# Altium PCB gecko3.PcbDoc (part 5 of 8)
Units mm, origin at the board's own origin, x right, y up, seen from the top; angles counter-clockwise.
Board outline 85.5 x 54.02 mm, 10 copper layers (Top Layer, MidLayer1, 1.2 & 2.5V Plane, GND Plane1, DDR layer 1, 3.3V Plane, DDR layer 2, GND Plane2, MidLayer2, Bottom Layer), stack 1.39 mm thick; 295 components, 567 nets, 2310 pads, 1568 vias.
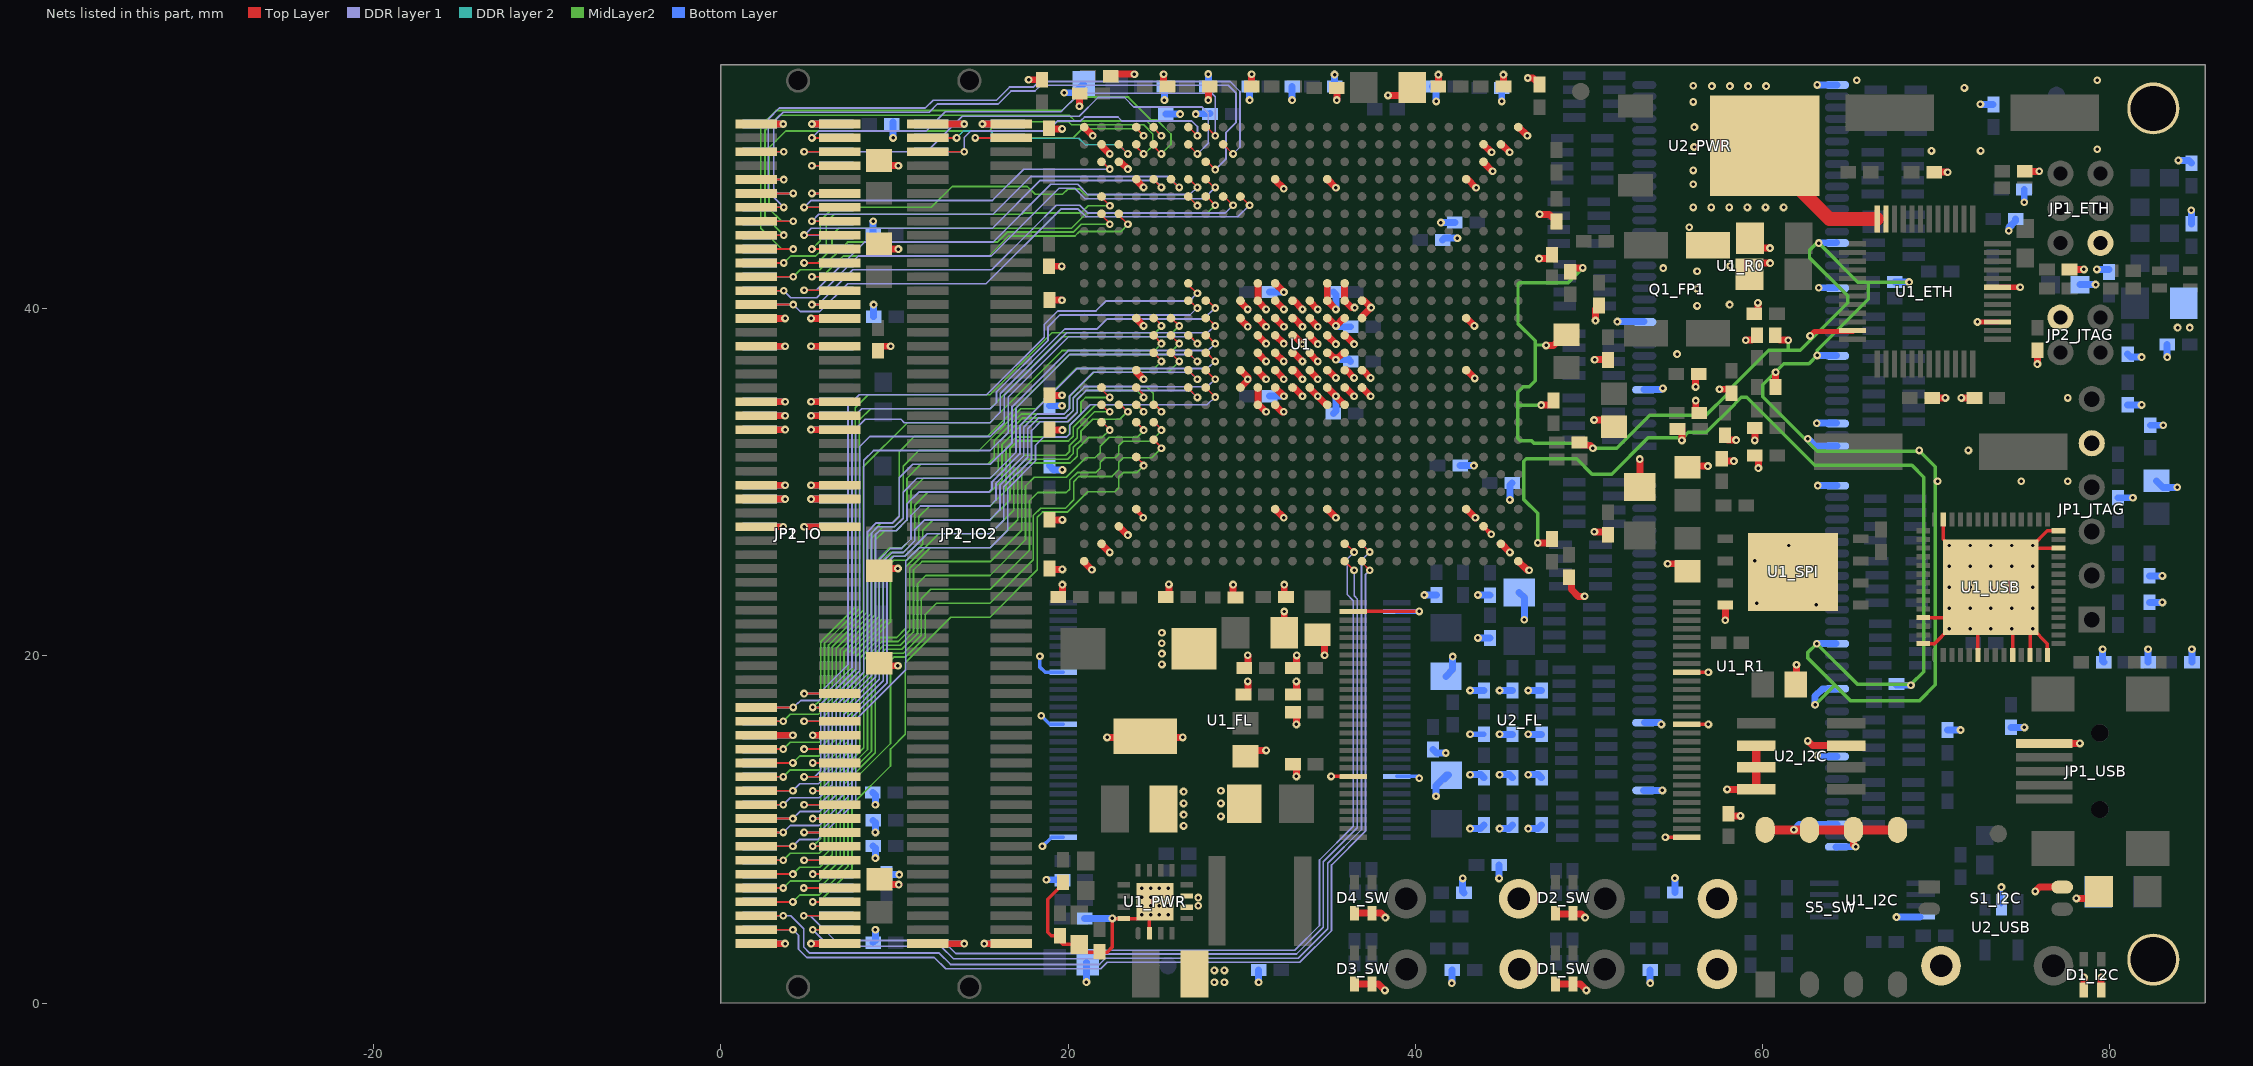
[diagram p13: the nets of this part, all layers, seen from the top]

## Via types
v1: diameter 0.45, hole 0.2, Top Layer to Bottom Layer, tented both sides, 1470 vias
v2: diameter 0.45, hole 0.2, Top Layer to Bottom Layer, tented bottom, 62 vias
v3: diameter 0.35, hole 0.15, Top Layer to MidLayer1, tented both sides, 26 vias
v4: diameter 0.45, hole 0.2, MidLayer2 to Bottom Layer, tented both sides, 10 vias

## Nets (pads, with @x,y where several pads share a name; then routed paths per layer and width w, separated by ;. In a path a pad name is that pad's centre, name@x,y a point inside that pad or via, vN(x,y) a via of type N, cw(c..) or ccw(c..) an arc to the next point about the centre after c; other vN are vias at no path point) (continued)
GND: C1_CNF.2 C1_ETH.1 C1_FL.1 C1_PWR.1 C1_USB.2 C2_CNF.2 C2_ETH.1 C2_FL.1 C2_FP1.1 C2_FP2.1 C2_IO.2 C2_PWR.1 C2_R0.1 C2_R1.1 C2_USB.1 C3_CNF.2 C3_ETH.1 C3_FL.1 C3_PWR.1 C3_USB.1 C4_CNF.2 C4_ETH.1 C4_FL.1 C4_PWR.1 C4_USB.1 C5_CNF.2 C5_ETH.1 C5_FL.1 C5_PWR.1 C5_USB.2 C6_CNF.2 C6_ETH.1 C6_FL.1 C6_USB.2 C7_CNF.1 C7_ETH.1 C7_FL.1 C7_PWR.2 C7_USB.2 C8_CNF.1 C8_ETH.1 C8_PWR.2 C8_USB.2 C9_CNF.1 C9_ETH.1 C9_PWR.2 C9_USB.2 C10_CNF.1 C10_ETH.1 C10_PWR.1 C10_USB.2 C11_CNF.1 C11_ETH.1 C11_PWR.1 C11_USB.2 C12_CNF.1 C12_ETH.1 C12_PWR.2 C12_USB.2 C13_CNF.1 C13_ETH.1 C13_PWR.2 C13_USB.2 C14_CNF.1 C14_PWR.2 C15_CNF.1 C15_PWR.1 C16_CNF.1 C16_PWR.2 C17_CNF.1 C17_PWR.1 C18_CNF.1 C18_PWR.2 C19_CNF.1 C19_PWR.2 C20_CNF.1 C20_PWR.2 C21_CNF.1 C21_PWR.2 C22_CNF.1 C22_PWR.2 C23_CNF.1 C24_CNF.1 C25_CNF.1 C26_CNF.1 C27_CNF.1 C28_CNF.1 C29_CNF.1 C30_CNF.1 C31_CNF.1 C32_CNF.1 C33_CNF.1 C34_CNF.1 C35_CNF.1 C36_CNF.1 C37_CNF.1 C38_CNF.1 C39_CNF.1 C40_CNF.1 C41_CNF.1 C42_CNF.1 C43_CNF.1 C44_CNF.1 C45_CNF.1 C46_CNF.1 C47_CNF.1 C48_CNF.1 C49_CNF.1 C50_CNF.1 C51_CNF.1 C52_CNF.1 C53_CNF.1 C54_CNF.1 C55_CNF.1 C56_CNF.1 C57_CNF.1 C58_CNF.1 C59_CNF.1 C60_CNF.1 C61_CNF.1 C62_CNF.1 C63_CNF.1 C64_CNF.1 C65_CNF.1 C66_CNF.1 C67_CNF.1 C68_CNF.1 C69_CNF.1 C70_CNF.1 C71_CNF.1 C72_CNF.1 C73_CNF.1 C74_CNF.1 C75_CNF.1 C76_CNF.1 C77_CNF.1 C78_CNF.1 C79_CNF.1 C80_CNF.1 C81_CNF.1 C82_CNF.1 C83_CNF.1 C84_CNF.1 C85_CNF.1 C86_CNF.1 C87_CNF.1 C88_CNF.1 C89_CNF.1 C90_CNF.1 C91_CNF.1 C92_CNF.1 C93_CNF.1 C94_CNF.1 C95_CNF.1 C96_CNF.1 C97_CNF.1 C98_CNF.1 D1_I2C.2 D1_I2C.4 D1_SW.2 D1_SW.4 D2_SW.2 D2_SW.4 D3_SW.2 D3_SW.4 D4_SW.2 D4_SW.4 JP1_ETH.6 JP1_IO2.1 JP1_IO2.2 JP1_IO2.119 JP1_IO2.120 JP1_IO.1 JP1_IO.2 JP1_IO.5 JP1_IO.8 JP1_IO.9 JP1_IO.12 JP1_IO.29 JP1_IO.30 JP1_IO.33 JP1_IO.34 JP1_IO.41 JP1_IO.42 JP1_IO.43 JP1_IO.44 JP1_IO.45 JP1_IO.46 JP1_IO.53 JP1_IO.54 JP1_IO.55 JP1_IO.56 JP1_IO.59 JP1_IO.60 JP1_IO.89 JP1_IO.90 JP1_IO.119 JP1_IO.120 JP1_JTAG.5 JP1_USB.GND JP2_IO2.1 JP2_IO2.2 JP2_IO2.119 JP2_IO2.120 JP2_IO.1 JP2_IO.2 JP2_IO.5 JP2_IO.8 JP2_IO.9 JP2_IO.12 JP2_IO.29 JP2_IO.30 JP2_IO.33 JP2_IO.34 JP2_IO.41 JP2_IO.42 JP2_IO.43 JP2_IO.44 JP2_IO.45 JP2_IO.46 JP2_IO.53 JP2_IO.54 JP2_IO.55 JP2_IO.56 JP2_IO.59 JP2_IO.60 JP2_IO.89 JP2_IO.90 JP2_IO.119 JP2_IO.120 JP2_JTAG.1 pad.0 Q1_FP1.2 R1_CNF.2 R1_USB.2 R2_ETH.1 R2_FL.2 R2_PWR.2 R3_ETH.1 R4_PWR.1 R7_PWR.1 S1_I2C.4 S1_SW.2 S1_USB.1 S2_SW.2 S3_SW.2 S4_SW.1 S5_SW.5 S5_SW.6 S5_SW.7 S5_SW.8 TP1_PWR.1 U1.A1 U1.A26 U1.AC4 U1.AC12 U1.AC15 U1.AC23 U1.AD3 U1.AD24 U1.AE2 U1.AE3 U1.AE25 U1.AF1 U1.AF26 U1.B2 U1.B25 U1.C3 U1.C24 U1.D4 U1.D12 U1.D15 U1.D23 U1.K11 U1.K12 U1.K15 U1.K16 U1.L10 U1.L11 U1.L12 U1.L13 U1.L14 U1.L15 U1.L16 U1.L17 U1.M4 U1.M10 U1.M11 U1.M12 U1.M13 U1.M14 U1.M15 U1.M16 U1.M17 U1.M23 U1.N11 U1.N12 U1.N13 U1.N14 U1.N15 U1.N16 U1.P11 U1.P12 U1.P13 U1.P14 U1.P15 U1.P16 U1.R4 U1.R10 U1.R11 U1.R12 U1.R13 U1.R14 U1.R15 U1.R16 U1.R17 U1.R23 U1.T10 U1.T11 U1.T12 U1.T13 U1.T14 U1.T15 U1.T16 U1.T17 U1.U11 U1.U12 U1.U15 U1.U16 U1_ETH.15 U1_ETH.19 U1_ETH.35 U1_ETH.36 U1_ETH.47 U1_FL.2 U1_FL.21 U1_FL.29 U1_FL.42 U1_FL.48 U1_I2C.4 U1_PWR.2 U1_PWR.6 U1_PWR.7 U1_PWR.16 U1_PWR.17 U1_R0.6 U1_R0.12 U1_R0.34 U1_R0.48 U1_R0.52 U1_R0.58 U1_R0.64 U1_R0.66 U1_R1.6 U1_R1.12 U1_R1.34 U1_R1.48 U1_R1.52 U1_R1.58 U1_R1.64 U1_R1.66 U1_SPI.4 U1_SPI.9 U1_USB.6 U1_USB.10 U1_USB.12 U1_USB.14 U1_USB.26 U1_USB.28 U1_USB.41 U1_USB.53 U1_USB.56 U1_USB.57 U2_FL.2 U2_FL.21 U2_FL.29 U2_FL.42 U2_FL.48 U2_I2C.2 U2_I2C.3 U2_I2C.4 U2_I2C.7 U2_PWR.4 U2_USB.2 | length 554.4
  Top Layer w0.1: JP2_IO.9@2.05,47.425 v1(3.625,47.425) ; JP2_IO.5@2.05,49.025 v1(3.625,49.025) ; v1(5.25,46.625) JP2_IO.12@6.85,46.625 ; v1(5.25,48.225) JP2_IO.8@6.85,48.225
  Top Layer w0.2: C2_PWR.1@19.7,6.95 19.7,6.85 18.825,5.975 18.825,4.075 19.025,3.875 C3_PWR.1@19.525,3.875 19.525,3.55 19.7,3.375 R4_PWR.1@20.65,3.375 21.1,2.925 22.25,2.925 22.55,3.225 v1(22.55,4.875) 22.561,4.864 24.018,4.864 v2(24.246,5.092) ; U1_PWR.2@24.681,4.019 24.681,5.02 v2(24.753,5.092) ; v1(35.15,13.05) 36.411,13.05 U2_FL.21@36.397,13.036 ; U2_FL.2@36.425,22.525 36.454,22.554 v1(40.221,22.554) ; v1(54.4,9.55) U2_FL.29@55.625,9.55 ; U2_FL.48@55.583,19.05 U2_FL.48@55.597,19.036 ; U2_FL.42@55.625,16.05 v1(56.875,16.05) ; U2_FL.48@55.625,19.05 v1(56.875,19.05) ; U1_USB.56@69.25,20.7 69.9,20.7 v2(70.75,21.55) ; U1_USB.53@69.25,22.2 70.6,22.2 70.75,22.35 v2(70.75,22.75) ; U1_USB.41@70.4,27.85 70.4,26.7 v2(70.75,26.35) ; v2(71.95,21.55) 72.325,21.55 72.4,21.475 U1_USB.6@72.4,20.05 ; v2(74.35,21.55) 74.4,21.5 U1_USB.10@74.4,20.05 ; U1_USB.12@75.4,20.05 75.4,21.4 v2(75.55,21.55) 76.4,20.7 U1_USB.14@76.4,20.05 ; U1_USB.26@77.05,26.2 75.7,26.2 v2(75.55,26.35) 76.4,27.2 U1_USB.28@77.05,27.2
  Top Layer w0.254: U1.D23@23.927,28.449 23.927,28.423 v1(24.325,27.95) ; U1.L13@33.927,35.449 U1.L13@33.931,35.449 ; U1.K12@34.927,34.449 U1.K12@34.927,34.453 ; U1.U12@34.927,41.449 U1.U12@34.953,41.449 ; U1.N11@35.874,37.449 U1.N11@35.927,37.449 ; U1.K11@35.924,34.449 U1.K11@35.927,34.449 ; U1.R11@35.927,39.438 U1.R11@35.927,39.449 ; U1.R10@36.927,39.449 U1.R10@36.933,39.449 ; U1.C3@43.927,27.449 v1(44.375,27)
  Top Layer w0.3: U1.AD3@43.927,48.423 U1.AD3@43.927,48.449 ; U1.AF1@45.927,50.449 U1.AF1@45.951,50.449 ; v1(62.736,38.421) 62.986,38.671 U1_ETH.47@65.186,38.671 ; v1(72.375,39.225) U1_ETH.15@73.525,39.225 ; U1_ETH.19@73.525,41.225 v1(74.825,41.225)
  Top Layer w0.381: JP2_IO.119@2.05,3.425 v1(3.7,3.425) ; JP2_IO.89@2.05,15.425 v1(4.15,15.425) ; JP2_IO.59@2.05,27.425 v1(3.6,27.425) ; JP2_IO.55@2.05,29.025 v1(3.7,29.025) ; JP2_IO.53@2.05,29.825 v1(3.7,29.825) ; JP2_IO.45@2.05,33.025 v1(3.7,33.025) ; JP2_IO.43@2.05,33.825 v1(3.7,33.825) ; JP2_IO.41@2.05,34.625 v1(3.7,34.625) ; JP2_IO.33@2.05,37.825 v1(3.7,37.825) ; JP2_IO.29@2.05,39.425 v1(3.7,39.425) ; JP2_IO.1@2.05,50.625 v1(3.6,50.625) ; v1(4.8,27.425) JP2_IO.60@6.85,27.425 ; v1(5.2,3.425) JP2_IO.120@6.85,3.425 ; v1(5.2,29.025) JP2_IO.56@6.85,29.025 ; v1(5.2,29.825) JP2_IO.54@6.85,29.825 ; v1(5.2,33.025) JP2_IO.46@6.85,33.025 ; v1(5.2,33.825) JP2_IO.44@6.85,33.825 ; v1(5.2,34.625) JP2_IO.42@6.85,34.625 ; v1(5.2,37.825) JP2_IO.34@6.85,37.825 ; v1(5.2,39.425) JP2_IO.30@6.85,39.425 ; v1(5.25,50.625) JP2_IO.2@6.85,50.625 ; v1(5.3,15.425) JP2_IO.90@6.85,15.425 ; JP1_IO2.119@11.918,3.426 v1(14.025,3.425) ; JP1_IO2.1@11.918,50.626 v1(14.025,50.625) ; v1(15.068,50.626) JP1_IO2.2@16.718,50.626 ; v1(15.175,3.425) JP1_IO2.120@16.718,3.426
  Top Layer w0.4: C74_CNF.1@9.05,37.6 9.275,37.825 v1(9.775,37.825) ; C2_CNF.2@9.1,43.7 9.375,43.425 v1(10.225,43.425) ; C70_CNF.1@9.1,48.525 9.4,48.225 v1(10.225,48.225) ; C3_CNF.2@9.125,19.575 9.275,19.425 v1(10.2,19.425) ; C1_CNF.2@9.125,24.9 9.25,25.025 v1(10.2,25.025) ; C5_CNF.2@9.15,7.125 9.45,6.825 v1(10.25,6.825) ; v1(17.725,53.175) C76_CNF.1@18.5,53.175 ; C76_CNF.1@18.497,53.17 C76_CNF.1@18.633,53.034 ; C52_CNF.1@18.897,42.424 18.904,42.431 v1@19.645,42.431 ; C89_CNF.1@18.9,50.375 18.929,50.346 v1(19.659,50.346) ; C62_CNF.1@18.923,40.491 19.634,40.491 v1(19.65,40.475) v1@19.641,40.491 ; C87_CNF.1@18.925,25.025 18.975,24.975 v1(19.675,24.975) ; C88_CNF.1@18.925,27.65 C88_CNF.1@19.062,27.787 ; C88_CNF.1@18.925,27.825 v1(19.675,27.825) ; C77_CNF.1@18.929,33.029 18.958,33 v1(19.675,33) ; C61_CNF.1@18.931,35.01 18.941,35 v1(19.65,35) ; C86_CNF.1@19.425,23.35 19.675,23.6 v1(19.675,24.1) ; v1(20.657,51.649) 20.657,52.362 C90_CNF.1@20.67,52.376 ; U1.A26@20.927,25.449 20.927,25.398 v1(21.375,24.95) ; U1.AF26@20.927,50.449 v1(21.425,49.95) ; U1.B25@21.927,26.449 21.927,26.423 v1(22.4,25.95) ; U1.AE25@21.927,49.449 21.927,49.373 v1(22.4,48.9) ; v1(22.25,15.3) v1(26.6,15.3) ; C29_CNF.1@22.45,53.375 22.568,53.493 v1(23.824,53.493) ; U1.C24@22.927,27.449 v1@23.425,26.95 ; U1.AD24@22.927,48.449 23.026,48.449 v1(23.45,48.025) ; U1.M23@23.927,36.449 23.927,36.348 v1(24.35,35.925) ; U1.R23@23.927,39.449 23.927,39.423 v1(24.35,39) ; U1.AC23@23.927,47.449 23.927,47.398 v1(24.35,46.975) ; v1(25.499,53.495) 25.499,52.97 C30_CNF.1@25.714,52.755 ; C75_CNF.1@25.635,23.367 25.811,23.543 v1(25.811,24.106) ; v1(28.075,52) 28.075,52.7 C41_CNF.1@28.15,52.775 ; v1(29.5,24.1) 29.5,23.501 C51_CNF.1@29.641,23.359 ; U1.L17@29.927,35.449 30.35,35.872 30.35,36.026 U1.M17@29.927,36.449 ; U1.R17@29.927,39.449 29.927,39.373 v1(30.35,38.95) ; U1.T17@29.927,40.449 29.927,40.373 v1(30.35,39.95) ; C35_CNF.1@30.1,17.775 30.35,18.025 v1(30.35,18.525) ; C3_FL.1@30.2,19.3 30.35,19.45 v1(30.35,20.025) ; C4_CNF.2@30.225,14.225 30.55,14.55 v1(31.4,14.55) ; C60_CNF.1@30.569,52.785 v1(30.569,53.486) ; U1.L16@30.927,35.449 U1.K16@30.927,34.449 31.001,34.449 v1(31.4,34.05) ; U1.M16@30.927,36.449 30.927,36.398 v1(31.4,35.925) ; U1.N16@30.927,37.449 30.927,37.423 v1(31.4,36.95) ; U1.P16@30.927,38.448 v1(31.4,37.975) ; U1.R16@30.927,39.449 30.927,39.423 v1(31.4,38.95) ; U1.U16@30.927,41.449 30.927,40.423 v1(31.4,39.95) ; U1.D15@31.927,28.448 v1(32.425,27.95) ; U1.K15@31.927,34.449 32.326,34.05 v1(32.425,34.05) ; U1.L15@31.927,35.449 32.431,34.945 v1(32.434,34.945) ; U1.M15@31.927,36.449 31.976,36.449 v1(32.425,35.925) ; U1.N15@31.927,37.449 v1(32.425,36.95) ; U1.P15@31.927,38.449 31.951,38.449 v1(32.425,37.975) ; U1.R15@31.927,39.449 v1(32.43,38.945) ; U1.T15@31.927,40.449 v1(32.43,39.945) ; U1.U15@31.927,41.449 31.931,41.449 v1(32.434,40.945) ; U1.AC15@31.927,47.449 31.927,47.398 v1(32.425,46.9) ; C46_CNF.1@32.45,21.325 v1(32.45,22.55) ; v1(32.45,24.1) 32.45,23.475 C66_CNF.1@32.55,23.375 ; C8_CNF.1@32.925,13.8 33.15,13.575 v1(33.15,13.05) ; U1.L14@32.927,35.449 33.001,35.449 v1(33.5,34.95) ; U1.M14@32.927,36.449 33.051,36.449 v1(33.5,35.925) ; U1.N14@32.927,37.449 33.001,37.449 v1(33.5,36.95) ; U1.P14@32.927,38.449 33.001,38.449 v1(33.5,37.95) ; U1.R14@32.927,39.449 33.001,39.449 v1(33.5,38.95) ; U1.T14@32.927,40.449 33.001,40.449 v1(33.5,39.95) ; C5_FL.1@32.931,19.294 32.956,19.294 33.165,19.503 v1(33.165,20.022) ; C40_CNF.1@32.95,16.75 33.15,16.55 v1(33.15,16.05) ; C2_FL.1@32.95,17.775 33.15,17.975 v1(33.15,18.525) ; U1.L13@33.927,35.449 33.927,35.398 34.876,34.449 U1.K12@34.927,34.449 ; U1.M13@33.927,36.449 v1(34.375,35.925) ; U1.N13@33.927,37.449 33.927,37.398 v1(34.375,36.95) ; U1.P13@33.927,38.449 33.927,38.398 v1(34.375,37.95) ; U1.R13@33.927,39.449 33.927,39.398 v1(34.375,38.95) ; U1.T13@33.927,40.449 33.927,40.398 v1(34.375,39.95) ; C49_CNF.1@34.375,21.2 34.775,20.8 v1(34.775,20.025) ; U1.D12@34.927,28.448 v1(35.425,27.95) ; U1.L12@34.927,35.448 35.924,34.451 U1.K11@35.924,34.449 ; U1.M12@34.927,36.449 34.976,36.449 v1(35.425,36) ; U1.N12@34.927,37.449 35.026,37.449 v1(35.425,37.05) 35.824,37.449 U1.N11@35.927,37.449 ; U1.P12@34.927,38.448 v1(35.425,37.95) ; U1.R12@34.927,39.449 34.976,39.449 v1(35.425,39) 35.863,39.438 U1.R11@35.927,39.438 ; U1.U12@34.927,41.449 U1.T12@34.927,40.449 v1(35.425,39.95) ; U1.AC12@34.927,47.449 v1(35.425,46.95) ; v1(35.475,52) C63_CNF.1@35.475,52.725 ; U1.L11@35.927,35.449 35.976,35.449 v1(36.475,34.95) ; U1.M11@35.927,36.449 36.026,36.449 v1(36.475,36) ; U1.P11@35.927,38.449 35.976,38.449 v1(36.475,37.95) ; U1.U11@35.927,41.449 U1.T11@35.927,40.449 36.326,40.05 v1(36.5,40.05) ; D3_SW.2@36.5,1.1 37.875,1.1 v1(38.25,0.725) ; D4_SW.2@36.5,5.175 38.025,5.175 v1(38.275,4.925) ; U1.L10@36.927,35.448 v1(37.425,34.95) ; U1.M10@36.927,36.449 36.976,36.449 v1(37.425,36) ; U1.R10@36.927,39.449 36.927,39.527 v1(37.45,40.05) 37.051,40.449 U1.T10@36.927,40.449 ; v1(38.425,52.275) 39.375,52.275 C47_CNF.1@39.825,52.725 ; R1_CNF.2@41.325,52.775 v1(41.325,53.475) ; U1.D4@42.927,28.449 42.952,28.449 v1(43.455,27.945) ; U1.M4@42.927,36.449 42.951,36.449 v1(43.425,35.975) ; U1.R4@42.927,39.449 42.951,39.449 v1(43.4,39) ; U1.AC4@42.927,47.449 43.001,47.449 v1(43.5,46.95) ; U1.AD3@43.927,48.423 v1(44.45,47.9) ; U1.AE3@43.927,49.449 v1(44.394,49.002) ; U1.B2@44.875,26.45 44.95,26.45 v1(45.45,25.95) ; U1.AE2@44.927,49.449 44.976,49.449 v1(45.425,49) ; C94_CNF.1@45.075,52.775 v1(45.075,53.475) ; U1.A1@45.927,25.423 45.929,25.423 45.951,25.425 46.451,24.925 v1(46.55,24.925) ; U1.AF1@45.951,50.449 v1(46.45,49.95) ; v1(46.475,53.275) 46.775,53.275 C93_CNF.1@47.15,52.9 C93_CNF.1@47.15,52.675 ; v1(47.05,26.5) 47.65,26.5 C85_CNF.1@47.875,26.725 ; v1(47.125,42.875) 47.645,42.875 C81_CNF.1@47.856,43.087 ; v1(47.156,45.425) 47.714,45.425 C2_FP2.1@48.128,45.011 ; v1(47.254,34.438) 47.739,34.438 C82_CNF.1@47.983,34.682 ; v1(47.525,37.875) 47.944,37.875 C48_CNF.1@48.565,38.497 ; D1_SW.2@48.075,1.1 49.5,1.1 49.85,0.75 v1(49.85,0.725) ; D2_SW.2@48.075,5.125 49.575,5.125 v1(49.775,4.925) ; C83_CNF.1@48.85,24.475 48.9,24.475 49,24.375 49,23.805 49.38,23.425 v1(49.75,23.425) ; C83_CNF.1@48.875,24.6 C83_CNF.1@48.9,24.6 ; C54_CNF.1@49.2,42.335 v1(49.642,42.335) ; C2_FP1.1@49.425,32.325 49.625,32.125 50.05,32.125 v1(50.225,31.95) ; C2_FP1.1@49.45,32.275 C2_FP1.1@49.708,32.275 ; v1(50.291,33.578) 51.062,33.578 C69_CNF.1@51.439,33.201 ; v1(50.31,27.138) C73_CNF.1@50.927,27.138 ; v1(50.325,37.05) 51.031,37.05 51.074,37.007 C72_CNF.1@51.101,37.034 ; v1(50.375,39.3) 50.375,39.975 C21_PWR.2@50.575,40.175 ; C67_CNF.1@52.925,29.725 v1(52.925,31.325) ; v1(54.526,25.298) 55.244,25.298 C68_CNF.1@55.671,24.87 ; C14_PWR.2@55.077,33.045 C14_PWR.2@55.25,33.045 ; v1(55.35,32.4) C14_PWR.2@55.35,33.045 ; C6_CNF.2@55.675,30.85 55.675,30.925 v1(56.85,30.925) ; v1(56.14,35.488) 56.14,36.013 C19_PWR.2@56.355,36.228 ; v1(56.15,34.7) 56.15,34.2 C37_CNF.1@56.375,33.975 ; v1(57.516,35.35) 58.016,35.35 C20_PWR.2@58.231,35.135 ; C12_PWR.2@57.608,31.428 57.823,31.213 v1(58.348,31.213) ; C36_CNF.1@57.7,32.7 57.975,32.425 v1(58.475,32.425) ; v1(57.85,22.05) U1_SPI.4@57.85,22.92 ; v1(57.95,12.3) 59.628,12.3 U2_I2C.4@59.63,12.302 ; C12_CNF.1@58,10.9 58.125,10.775 v1(58.725,10.775) ; v1(59.025,38.175) 59.392,38.175 R7_PWR.1@59.679,38.462 ; C17_PWR.1@59.252,41.977 59.887,42.612 v1(60.432,42.612) ; C10_PWR.1@59.275,44.05 59.85,43.475 v1(60.425,43.475) ; C14_CNF.1@59.512,39.576 59.734,39.797 v1(59.725,40.325) ; C18_CNF.1@59.545,31.553 59.76,31.338 v1(59.76,30.813) ; v1(59.55,32.4) C18_PWR.2@59.55,33.125 ; C15_PWR.1@60.729,38.462 C15_PWR.1@60.965,38.227 ; C11_PWR.1@60.746,35.475 60.756,35.485 v1(60.75,36.325) ; C15_PWR.1@60.976,38.173 v1(61.478,38.173) ; C71_CNF.1@61.901,18.348 61.951,18.398 v1(61.951,19.479) ; v1(62.6,15.1) 62.875,14.825 64.803,14.825 U2_I2C.7@64.812,14.817 ; S5_SW.6@65.236,9.969 65.236,9.107 65.243,9.107 v1(65.35,9) ; C3_USB.1@69.775,34.85 v1(70.525,34.85) ; C10_ETH.1@69.875,47.85 v1(70.65,47.85) ; v1(71.45,34.85) C2_USB.1@72.2,34.85 ; C9_ETH.1@75.1,47.9 75.923,47.9 v1(75.932,47.908) ; v1(75.7,6.425) 75.95,6.675 S1_I2C.4@77.25,6.675 ; v1(75.825,36.8) C8_ETH.1@75.825,37.6 ; JP1_USB.GND@76.225,14.95 78.2,14.95 v1(78.275,14.95) ; C4_ETH.1@77.675,42.25 v1(78.5,42.25) ; v1(78.075,6.025) 78.975,6.025 C1_USB.2@79.375,6.425 ; D1_I2C.2@78.5,0.75 v1(78.5,1.49) ; D1_I2C.4@79.5,0.75 v1(79.5,1.49)
  Top Layer w0.5: U2_I2C.4@59.63,12.302 U2_I2C.2@59.63,14.817 ; S5_SW.8@60.167,9.965 S5_SW.5@67.787,9.965
  Top Layer w0.8: U2_PWR.4@60.125,49.375 60.125,48.875 63.85,45.15 U1_ETH.36@66.6,45.15
  MidLayer2 w0.2: 45.911,34.438 v1(47.254,34.438) ; 46.9,37.925 v1(47.525,37.875) ; v1(47.05,26.5) 47.05,28.2 46.252,28.998 46.252,31.202 46.391,31.341 49.284,31.341 50.175,30.45 51.3,30.45 53.4,32.55 v1@55.4,32.55 ; v1(49.642,42.335) 48.804,41.496 46.011,41.496 45.911,41.396 45.911,39.121 46.9,38.132 46.9,35.835 46.561,35.496 46.221,35.496 45.9,35.175 45.9,32.53 46.052,32.378 46.691,32.378 46.816,32.253 49.922,32.253 v1(50.225,31.95) 51.6,31.95 53.5,33.85 56.74,33.85 58.011,35.121 58.011,35.261 60.346,37.596 62.161,37.596 64.9,40.335 64.9,40.725 62.7,42.925 62.7,43.35 63.121,43.771 v1(63.236,43.771) 65.486,41.521 v1(68.436,41.521) ; v1@55.25,32.4 55.425,32.575 55.45,32.6 55.721,32.871 56.761,32.871 58.297,34.407 58.515,34.625 58.774,34.884 59.091,34.884 63,30.975 68.6,30.975 69.286,30.289 69.286,19.086 68.571,18.371 65.441,18.371 v1(63.117,20.696) ; v1(61.478,38.173) 61.486,38.165 61.486,37.596 ; v1(63.025,17.175) 63.025,17.181 64.163,18.319 ; v1(63.117,20.696) 62.586,20.165 62.586,19.896 64.163,18.319 ; 66.086,41.521 66.086,40.531 63.142,37.587 v1(63.142,37.296) 62.671,36.825 61.225,36.825 60,35.6 60,34.925 63.138,31.787 69.038,31.787 69.95,30.875 69.95,18.325 69.021,17.396 65.086,17.396 64.163,18.319
  Bottom Layer w0.1: JP1_IO.9@2.25,47.425 v1(3.625,47.425) ; JP1_IO.5@2.25,49.025 v1(3.625,49.025) ; v1(5.25,46.625) JP1_IO.12@6.65,46.625 ; v1(5.25,48.225) JP1_IO.8@6.65,48.225
  Bottom Layer w0.2: v1(18.375,19.975) 18.375,19.35 18.675,19.05 U1_FL.48@19.725,19.05 ; v1(18.45,16.55) 18.95,16.05 U1_FL.42@19.725,16.05 ; v1(18.525,9.025) 19.05,9.55 U1_FL.29@19.725,9.55 ; U1_FL.21@38.925,13.05 v1@40.225,13.05 ; U2_USB.2@73.754,5.659 v1(73.754,6.675)
  Bottom Layer w0.3: U1_FL.2@38.925,22.55 v1(40.221,22.554) ; v1(43.15,15.475) C32_CNF.1@43.95,15.475
  Bottom Layer w0.381: JP1_IO.119@2.25,3.425 v1(3.7,3.425) ; JP1_IO.89@2.25,15.425 v1(4.15,15.425) ; JP1_IO.59@2.25,27.425 v1(3.6,27.425) ; JP1_IO.55@2.25,29.025 v1(3.7,29.025) ; JP1_IO.53@2.25,29.825 v1(3.7,29.825) ; JP1_IO.45@2.25,33.025 v1(3.7,33.025) ; JP1_IO.43@2.25,33.825 v1(3.7,33.825) ; JP1_IO.41@2.25,34.625 v1(3.7,34.625) ; JP1_IO.33@2.25,37.825 v1(3.7,37.825) ; JP1_IO.29@2.25,39.425 v1(3.7,39.425) ; JP1_IO.1@2.25,50.625 v1(3.6,50.625) ; v1(4.8,27.425) JP1_IO.60@6.65,27.425 ; v1(5.2,3.425) JP1_IO.120@6.65,3.425 ; v1(5.2,29.025) JP1_IO.56@6.65,29.025 ; v1(5.2,29.825) JP1_IO.54@6.65,29.825 ; v1(5.2,33.025) JP1_IO.46@6.65,33.025 ; v1(5.2,33.825) JP1_IO.44@6.65,33.825 ; v1(5.2,34.625) JP1_IO.42@6.65,34.625 ; v1(5.2,37.825) JP1_IO.34@6.65,37.825 ; v1(5.2,39.425) JP1_IO.30@6.65,39.425 ; v1(5.25,50.625) JP1_IO.2@6.65,50.625 ; v1(5.3,15.425) JP1_IO.90@6.65,15.425 ; JP2_IO2.119@12.118,3.426 v1(14.025,3.425) ; JP2_IO2.1@12.118,50.626 v1(14.025,50.625) ; v1(15.068,50.626) JP2_IO2.2@16.518,50.626 ; v1(15.175,3.425) JP2_IO2.120@16.518,3.426
  Bottom Layer w0.4: C13_CNF.1@8.75,12.125 8.9,11.975 v1(8.9,11.425) ; C16_CNF.1@8.775,3.475 8.9,3.6 v1(8.9,4.225) ; C17_CNF.1@8.775,9.05 8.9,8.925 v1(8.9,8.35) ; C9_CNF.1@8.775,10.525 8.9,10.4 v1(8.9,9.825) ; C38_CNF.1@8.775,44.275 v1(8.775,45.025) ; C39_CNF.1@8.8,39.525 v1(8.8,40.225) ; C7_CNF.1@9.55,7.45 9.6,7.4 v1(10.275,7.4) ; v1(9.925,49.825) C27_CNF.1@9.925,50.75 ; v1(18.75,7.1) 19.65,7.1 C22_PWR.2@19.675,7.075 ; C26_CNF.1@18.925,30.95 19.175,30.7 v1(19.675,30.7) ; C22_CNF.1@18.925,34.4 v1(19.65,34.4) ; v1(19.775,52.425) 20.4,52.425 C50_CNF.1@20.9,52.925 ; C1_PWR.1@20.95,4.875 v1(22.55,4.875) ; v1(21.058,1.21) C9_PWR.2@21.058,2.35 ; v1@25.55,51.975 v1(25.55,52) C28_CNF.1@25.55,52.775 ; C42_CNF.1@25.625,51.2 v1(26.45,51.2) ; v1(27.35,51.2) C25_CNF.1@28.175,51.225 ; C91_CNF.1@27.996,52.776 28.075,52.855 v1(28.075,53.5) ; C44_CNF.1@30.425,52.775 30.45,52.75 v1(30.45,52) ; v1(30.975,1.2) C15_CNF.1@30.975,1.9 ; C58_CNF.1@31.6,34.95 32.43,34.95 v1(32.434,34.945) ; C59_CNF.1@31.6,40.95 32.43,40.95 v1(32.434,40.945) ; C80_CNF.1@32.89,52.795 32.89,52.01 v1(32.9,52) ; C56_CNF.1@35.275,33.95 35.423,34.098 v1(35.425,34.95) ; C57_CNF.1@35.275,40.95 35.434,40.791 v1(35.425,39.95) ; C92_CNF.1@35.35,52.725 35.35,53.5 v1(35.35,53.475) ; v1(35.425,37.05) 36.175,37.05 C98_CNF.1@36.275,36.95 ; v1@35.439,38.95 C97_CNF.1@36.275,38.95 ; v1(40.525,23.5) C55_CNF.1@41.225,23.5 ; C79_CNF.1@41,52.775 41.2,52.575 v1(41.2,51.925) ; R2_FL.2@41.025,14.6 41.225,14.4 v1(41.75,14.4) ; v1(41.189,11.912) 41.189,12.514 C8_PWR.2@41.795,13.121 ; v1(41.475,44.95) C96_CNF.1@42.275,44.95 ; C65_CNF.1@41.575,43.95 41.675,44.05 v1(42.425,44.05) ; C8_PWR.2@41.679,12.915 C8_PWR.2@41.901,13.137 ; C45_CNF.1@41.764,18.815 42.15,19.201 v1(42.15,19.95) ; v1(42.1,1.15) 42.115,1.91 C10_CNF.1@42.125,1.9 ; C64_CNF.1@42.575,30.95 v1@43.369,30.95 ; v1(42.725,7.175) 42.725,6.425 C13_PWR.2@42.8,6.35 ; v1(43.15,10.05) 43.75,10.05 C11_CNF.1@43.95,10.25 ; v1(43.15,13.15) 43.775,13.15 C78_CNF.1@43.95,12.975 ; v1(43.15,18) C34_CNF.1@43.95,18 ; v1(43.6,21.025) C84_CNF.1@44.3,21.025 ; v1(43.6,23.5) 44.28,23.5 C24_CNF.1@44.294,23.486 ; v1(44.825,7.175) C20_CNF.1@44.825,7.95 ; v1(44.85,10.05) 45.4,10.05 C6_FL.1@45.6,10.25 ; v1(44.85,13.15) 45.425,13.15 C43_CNF.1@45.6,12.975 ; v1(44.85,15.475) C33_CNF.1@45.6,15.475 ; v1(44.85,18) C23_CNF.1@45.6,18 ; v1(44.975,51.925) 44.975,52 C53_CNF.1@44.975,52.775 ; v1(45.45,28.975) 45.45,29.825 C95_CNF.1@45.575,29.95 ; C4_FL.1@45.981,23.644 46.275,23.35 v1(46.275,22.075) ; v1(46.5,10.05) 47.075,10.05 C7_FL.1@47.275,10.25 ; v1(46.5,13.15) 47.1,13.15 C1_FL.1@47.275,12.975 ; v1(46.5,15.475) C21_CNF.1@47.275,15.475 ; v1(46.5,18) C31_CNF.1@47.275,18 ; v1(51.636,39.246) U1_R0.12@53.161,39.246 ; U1_R1.6@53.136,12.246 v1(54.23,12.246) ; U1_R0.6@53.161,35.346 54.136,35.346 v1(54.261,35.396) ; U1_R1.12@53.186,16.146 54.079,16.146 v1(54.175,16.05) ; v1(53.525,1.15) C19_CNF.1@53.525,1.9 ; C16_PWR.2@54.95,6.375 v1(54.95,7.2) ; v1(61.8,9.975) 62.121,10.296 U1_R1.64@64.286,10.296 ; v1(62.6,32.5) 63.029,32.071 U1_R0.66@64.286,32.071 ; v1(63.025,17.175) 63.025,17.675 63.446,18.096 U1_R1.52@64.236,18.096 ; v1(63.117,20.696) U1_R1.48@64.236,20.696 ; v1(63.117,33.396) U1_R0.64@64.261,33.396 ; v1(63.142,37.296) U1_R0.58@64.261,37.296 ; v1(63.15,14.275) 63.229,14.196 U1_R1.58@64.286,14.196 ; v2(63.15,52.875) U1_R0.34@64.286,52.871 ; v1(63.175,29.8) 64.282,29.8 U1_R1.34@64.286,29.796 ; v1(63.236,41.196) U1_R0.52@64.261,41.196 ; v1(63.236,43.771) U1_R0.48@64.261,43.796 ; U1_R1.66@64.236,8.996 U1_R1.66@64.286,8.996 v1(65.35,9) ; C2_R0.1@67.609,41.521 v1(68.436,41.521) ; v1(67.71,4.95) U1_I2C.4@69.075,4.95 ; C2_R1.1@67.711,18.301 v1(68.538,18.301) ; C4_USB.1@70.65,15.725 v1(71.399,15.725) ; v1(72.543,51.758) C3_ETH.1@73.275,51.758 ; v1(74.175,44.475) 74.175,44.65 74.575,45.05 C5_ETH.1@74.575,45.15 ; C11_USB.2@74.3,15.875 v1(75.075,15.875) ; v1(75.067,46.118) R3_ETH.1@75.067,46.85 ; v1(78.075,6.025) 78.953,6.025 R1_USB.2@79.333,6.405 ; R2_ETH.1@78.275,41.375 v1(79.175,41.375) ; v1(79.25,42.25) C6_ETH.1@79.95,42.25 ; v1(79.575,20.375) 79.575,19.7 C8_USB.2@79.65,19.625 ; C10_USB.2@80.475,29.1 v1(81.325,29.1) ; C1_ETH.1@81.025,34.45 v1(81.825,34.45) ; C7_ETH.1@81.025,37.375 81.2,37.2 v1(81.825,37.2) ; C13_USB.2@82.2,19.625 v1(82.2,20.375) ; C7_USB.2@82.275,23.075 v1(83.025,23.075) ; C6_USB.2@82.275,24.6 v1(83.025,24.6) ; C9_USB.2@82.325,33.275 v1(83.075,33.275) ; C5_USB.2@82.675,30.075 83.05,29.7 v1(83.875,29.7) ; v1(83.3,37.2) C2_ETH.1@83.3,37.925 ; v1(83.95,48.525) 84.553,48.525 C12_ETH.1@84.706,48.372 ; C11_ETH.1@84.699,44.873 v1@84.699,45.641 ; C12_USB.2@84.725,19.625 v1(84.725,20.375)
  other v1: 28.425,1.2 29,1.2 28.425,1.875 29,1.875 27.5,5.6 27.5,6.075 26.65,10.2 28.8,10.75 26.65,10.85 26.65,11.5 28.8,11.5 26.65,12.175 28.8,12.225 40.225,12.95 25.4,19.5 25.4,20.125 25.399,20.724 25.4,21.325 23.45,26.95 70.075,30.05 74.9,30.05 77.575,30.05 43.375,30.95 69.025,31.825 71.85,31.825 77.575,34.85 34.375,34.95 30.35,35.925 55.075,37.375 83.9,38.9 84.6,38.9 56.225,40.15 58.1,40.225 56.225,41.125 56.225,42.15 54.275,42.325 19.633,42.424 58.125,42.45 55.775,44.675 84.683,45.657 69.725,49.075 72.55,49.075 79.275,49.175 71.625,52.7 65.425,53.15 79.275,53.15
  other v2: 25.247,5.092 25.767,5.092 24.246,5.599 24.753,5.599 25.247,5.599 25.767,5.599 24.246,6.093 24.753,6.093 25.247,6.093 25.767,6.093 24.246,6.613 24.753,6.613 25.247,6.613 25.767,6.613 73.15,21.55 71.95,22.75 73.15,22.75 74.35,22.75 75.55,22.75 63.1,22.925 59.675,23.025 70.75,23.95 71.95,23.95 73.15,23.95 74.35,23.95 75.55,23.95 70.75,25.15 71.95,25.15 73.15,25.15 74.35,25.15 75.55,25.15 59.55,25.475 61.5,26.35 71.95,26.35 73.15,26.35 74.35,26.35 56,45.825 57.041,45.825 58.083,45.825 59.124,45.825 60.166,45.825 61.207,45.825 56,47.15 56,47.95 56.05,49.3 56.075,50.45 56,51.9 56,52.825 57.077,52.812 58.119,52.812 59.16,52.812 60.202,52.812
GPIO1_0: JP1_IO.4 JP2_IO.4 U1.AF19 | length 30.4
  Top Layer w0.1: v1(5.25,49.825) JP2_IO.4@6.85,49.825 ; U1.AF19@27.927,50.449 27.976,50.449 v1(28.475,49.95)
  DDR layer 1 w0.1: v1(5.25,49.825) 5.65,50.225 11.825,50.225 12.925,51.325 19.593,51.325 20.671,52.403 28.272,52.403 28.475,52.2 v1(28.475,49.95)
  Bottom Layer w0.1: v1(5.25,49.825) JP1_IO.4@6.65,49.825
GPIO1_1: JP1_IO.6 JP2_IO.6 U1.AE20 | length 32.2
  Top Layer w0.1: v1(4.8,49.025) JP2_IO.6@6.85,49.025 ; U1.AE20@26.927,49.449 26.927,49.423 v1(27.45,48.9)
  DDR layer 1 w0.1: v1(4.8,49.025) 11.85,49.025 13.9,51.075 20.65,51.075 21.725,52.15 23.25,52.15 23.8,51.6 27.725,51.6 28.075,51.25 28.075,49.525 v1(27.45,48.9)
  Bottom Layer w0.1: v1(4.8,49.025) JP1_IO.6@6.65,49.025
GPIO1_2: JP1_IO.11 JP2_IO.11 U1.AD19 | length 42.5
  Top Layer w0.1: JP2_IO.11@2.05,46.625 v1(4.175,46.625) ; U1.AD19@27.927,48.449 28.026,48.449 v1(28.475,48)
  DDR layer 1 w0.1: v1(4.175,46.625) 3.325,46.625 3.05,46.9 3.05,50.75 3.6,51.3 12,51.3 12.475,51.775 15.968,51.775 16.718,52.525 18.093,52.525 18.421,52.853 29.229,52.853 29.675,52.407 29.675,50.725 29.1,50.15 29.1,48.625 v1(28.475,48)
  Bottom Layer w0.1: JP1_IO.11@2.25,46.625 v1(4.175,46.625)
GPIO1_3: JP1_IO.14 JP2_IO.14 U1.AD25 | length 23.1
  Top Layer w0.1: v1(4.8,45.825) JP2_IO.14@6.85,45.825 ; U1.AD25@21.927,48.449 21.976,48.449 v1(22.4,48.025)
  DDR layer 1 w0.1: v1(4.8,45.825) 5.2,46.225 15.65,46.225 17.45,48.025 19.075,48.025 v1(22.4,48.025)
  Bottom Layer w0.1: v1(4.8,45.825) JP1_IO.14@6.65,45.825
GPIO1_4: JP1_IO.13 JP2_IO.13 U1.AE18 | length 41.3
  Top Layer w0.1: JP2_IO.13@2.05,45.825 v1(3.625,45.825) ; U1.AE18@28.927,49.449 28.951,49.449 v1(29.5,48.9)
  DDR layer 1 w0.1: v1(3.625,45.825) 2.727,46.723 2.727,50.902 3.375,51.55 11.775,51.55 12.225,52 15.875,52 16.625,52.75 18,52.75 18.328,53.078 29.322,53.078 29.9,52.5 29.9,49.3 v1(29.5,48.9)
  Bottom Layer w0.1: JP1_IO.13@2.25,45.825 v1(3.625,45.825)
GPIO1_5: JP1_IO.16 JP2_IO.16 U1.AC21 | length 26.1
  Top Layer w0.1: v1(5.25,45.025) JP2_IO.16@6.85,45.025 ; U1.AC21@25.926,47.424 v1@26.375,46.975
  DDR layer 1 w0.1: v1(5.25,45.025) 5.65,45.425 15.675,45.425 17.85,47.6 25.75,47.6 v1@26.375,46.975
  Bottom Layer w0.1: v1(5.25,45.025) JP1_IO.16@6.65,45.025
  other v1: 26.4,46.975
GPIO1_6: JP1_IO.15 JP2_IO.15 U1.AE23 | length 34.4
  Top Layer w0.1: JP2_IO.15@2.05,45.025 v1(4.175,45.025) ; U1.AE23@23.927,49.449 23.927,49.323 v1(24.35,48.9)
  MidLayer2 w0.1: v1(4.175,45.025) 3.5,45.025 2.775,45.75 2.775,49.25 3.75,50.225 15.47,50.225 15.997,50.753 20.022,50.753 20.2,50.575 24.35,50.575 24.875,50.05 24.875,49.375 24.4,48.9 v1(24.35,48.9)
  Bottom Layer w0.1: JP1_IO.15@2.25,45.025 v1(4.175,45.025)
GPIO1_7: JP1_IO.18 JP2_IO.18 U1.AC22 | length 26.7
  Top Layer w0.1: v1@4.75,44.25 6.825,44.25 JP2_IO.18@6.85,44.225 ; U1.AC22@24.927,47.449 24.927,47.423 v1(25.375,46.975) ; v1@25.399,47 v1@25.425,46.975
  DDR layer 1 w0.1: v1(4.8,44.225) 5.2,44.625 15.65,44.625 18.4,47.375 25,47.375 25.398,47 v1@25.425,46.975
  Bottom Layer w0.1: v1(4.8,44.225) JP1_IO.18@6.65,44.225
GPIO1_8: JP1_IO.17 JP2_IO.17 U1.AF22 | length 33.8
  Top Layer w0.1: JP2_IO.17@2.05,44.225 v1(3.625,44.225) ; U1.AF22@24.927,50.449 24.927,50.398 v1(25.375,49.95)
  MidLayer2 w0.1: v1(3.625,44.225) 2.55,45.3 2.55,50.275 3.4,51.125 20.075,51.125 20.4,50.8 24.525,50.8 v1(25.375,49.95)
  Bottom Layer w0.1: JP1_IO.17@2.25,44.225 v1(3.625,44.225)
GPIO1_9: JP1_IO.20 JP2_IO.20 U1.AB20 | length 28.8
  Top Layer w0.1: v1(5.25,43.425) JP2_IO.20@6.85,43.425 ; U1.AB20@26.927,46.449 v1(27.45,45.925)
  MidLayer2 w0.1: v1(5.25,43.425) 5.725,43.9 5.725,45.05 6.5,45.825 12.125,45.825 13.325,47.025 17.65,47.025 18.1,46.575 19.675,46.575 19.975,46.875 20.675,46.875 21,46.55 26.825,46.55 v1(27.45,45.925)
  Bottom Layer w0.1: v1(5.25,43.425) JP1_IO.20@6.65,43.425
GPIO1_10: JP1_IO.19 JP2_IO.19 U1.AE22 | length 39.6
  Top Layer w0.1: JP2_IO.19@2.05,43.425 v1(4.175,43.425) ; U1.AE22@24.927,49.449 24.927,49.348 v1(25.375,48.9)
  MidLayer2 w0.1: v1(4.175,43.425) 3.5,43.425 2.3,44.625 2.3,50.525 3.175,51.4 19.65,51.4 20.425,52.175 23.475,52.175 24.8,50.85 25.125,50.85 25.925,50.05 25.925,49.45 v1(25.375,48.9)
  Bottom Layer w0.1: JP1_IO.19@2.25,43.425 v1(4.175,43.425)
GPIO1_11: JP1_IO.22 JP2_IO.22 U1.AB19 | length 30.2
  Top Layer w0.1: v1(4.8,42.625) JP2_IO.22@6.85,42.625 ; U1.AB19@27.927,46.473 U1.AB19@27.927,46.449 27.976,46.449 v1(28.475,45.95)
  MidLayer2 w0.1: v1(4.8,42.625) 5.575,42.625 6.4,43.45 6.4,44.225 6.8,44.625 20.2,44.625 21.075,45.5 28.025,45.5 v1(28.475,45.95)
  Bottom Layer w0.1: v1(4.8,42.625) JP1_IO.22@6.65,42.625
GPIO1_12: JP1_IO.21 JP2_IO.21 U1.AB25 | length 24.6
  Top Layer w0.1: JP2_IO.21@2.05,42.625 v1(3.625,42.625) ; U1.AB25@21.927,46.449 21.927,46.398 v1(22.411,45.914)
  MidLayer2 w0.1: v1(3.625,42.625) 4.025,43.025 5.475,43.025 6.075,43.625 6.075,44.975 6.525,45.425 17.35,45.425 17.421,45.496 20.746,45.496 21.164,45.914 v1(22.411,45.914)
  Bottom Layer w0.1: JP1_IO.21@2.25,42.625 v1(3.625,42.625)
GPIO1_13: JP1_IO.24 JP2_IO.24 U1.AA24 | length 23.3
  Top Layer w0.1: v1(5.25,41.825) JP2_IO.24@6.85,41.825 ; U1.AA24@22.927,45.449 22.927,45.373 v1(23.45,44.85)
  MidLayer2 w0.1: v1(5.25,41.825) 5.85,41.825 7.05,43.025 15.443,43.025 16.593,44.175 20.4,44.175 20.652,44.428 23.028,44.428 v1(23.45,44.85)
  Bottom Layer w0.1: v1(5.25,41.825) JP1_IO.24@6.65,41.825
GPIO1_14: JP1_IO.23 JP2_IO.23 U1.AA25 | length 24.3
  Top Layer w0.1: JP2_IO.23@2.05,41.825 v1(4.175,41.825) ; U1.AA25@21.927,45.449 21.927,45.373 22.4,44.9 v1(22.4,44.85)
  MidLayer2 w0.1: v1(4.175,41.825) 4.575,42.225 5.7,42.225 7.3,43.825 15.925,43.825 16.5,44.4 20.3,44.4 20.75,44.85 v1(22.4,44.85)
  Bottom Layer w0.1: JP1_IO.23@2.25,41.825 v1(4.175,41.825)
GPIO1_15: JP1_IO.26 JP2_IO.26 U1.AC20 | length 30.2
  Top Layer w0.1: v1(4.8,41.05) 6.825,41.05 JP2_IO.26@6.85,41.025 ; U1.AC20@26.927,47.449 26.976,47.449 v1(27.45,46.975)
  DDR layer 1 w0.1: v1(4.8,41.05) 5.5,41.05 8.275,43.825 15.675,43.825 19,47.15 20.55,47.15 21.136,46.564 27.014,46.564 v1(27.45,46.975)
  Bottom Layer w0.1: v1(4.8,41.05) 6.625,41.05 JP1_IO.26@6.65,41.025
GPIO1_16: JP1_IO.25 JP2_IO.25 U1.AC19 | length 31.8
  Top Layer w0.1: JP2_IO.25@2.05,41.025 v1(3.625,41.025) ; U1.AC19@27.927,47.449 28.401,46.975 v1(28.475,46.975)
  DDR layer 1 w0.1: v1(3.625,41.025) 4.025,40.625 5.525,40.625 7.925,43.025 15.575,43.025 19.475,46.925 20.375,46.925 20.972,46.328 27.828,46.328 v1(28.475,46.975)
  Bottom Layer w0.1: JP1_IO.25@2.25,41.025 v1(3.625,41.025)
GPIO1_17: JP1_IO.28 JP2_IO.28 U1.AB18 | length 30.8
  Top Layer w0.1: v1(5.25,40.225) JP2_IO.28@6.85,40.225 ; U1.AB18@28.927,46.449 29.001,46.449 v1(29.5,45.95)
  DDR layer 1 w0.1: v1(5.25,40.225) 5.6,40.225 7.6,42.225 15.6,42.225 17.95,44.575 19.325,45.95 20.675,45.95 21.122,45.503 29.053,45.503 v1(29.5,45.95)
  Bottom Layer w0.1: v1(5.25,40.225) JP1_IO.28@6.65,40.225
GPIO1_18: JP1_IO.27 JP2_IO.27 U1.AB17 | length 34.1
  Top Layer w0.1: JP2_IO.27@2.05,40.225 v1(4.175,40.225) ; U1.AB17@29.927,46.449 29.951,46.449 v1(30.45,45.95)
  DDR layer 1 w0.1: v1(4.175,40.225) 4.575,39.825 5.7,39.825 7.3,41.425 15.275,41.425 19.575,45.725 20.582,45.725 21.029,45.278 29.778,45.278 v1(30.45,45.95)
  Bottom Layer w0.1: JP1_IO.27@2.25,40.225 v1(4.175,40.225)
GPIO1_19: JP1_IO.84 JP2_IO.84 U1.U20 | length 46
  Top Layer w0.1: v1(4.8,17.825) JP2_IO.84@6.85,17.825 ; U1.U20@26.927,41.449 26.927,41.373 v1@27.425,40.875
  DDR layer 1 w0.1: v1(4.8,17.825) 5.675,17.825 7.327,19.477 7.327,34.375 7.977,35.025 15.3,35.025 18.625,38.35 18.625,39.075 19.403,39.853 21.603,39.853 22.175,40.425 26.975,40.425 v1@27.425,40.875
  Bottom Layer w0.1: v1(4.8,17.825) JP1_IO.84@6.65,17.825
  other v1: 27.45,40.875
GPIO1_20: JP1_IO.85 JP2_IO.85 U1.T20 | length 46.7
  Top Layer w0.1: JP2_IO.85@2.05,17.025 v1(4.175,17.025) ; U1.T20@26.927,40.449 27.001,40.449 v1@27.425,40.025
  DDR layer 1 w0.1: v1(4.175,17.025) 4.6,17.425 5.65,17.425 7.552,19.327 7.552,33.652 8.125,34.225 15.525,34.225 15.875,34.575 15.875,35.2 18.85,38.175 18.85,38.95 19.525,39.625 27.025,39.625 v1@27.425,40.025
  Bottom Layer w0.1: JP1_IO.85@2.25,17.025 v1(4.175,17.025)
  other v1: 27.45,40.025
GPIO1_21: JP1_IO.86 JP2_IO.86 U1.R22 | length 41.5
  Top Layer w0.1: v1(5.3,17.025) JP2_IO.86@6.85,17.025 ; U1.R22@24.927,39.449 24.976,39.449 v1@25.425,39
  MidLayer2 w0.1: v1(5.3,17.025) 5.75,17.475 5.75,20.8 7.75,22.8 7.75,34.275 8.5,35.025 15.5,35.025 19.075,38.6 25.025,38.6 v1@25.425,39
  Bottom Layer w0.1: v1(5.3,17.025) JP1_IO.86@6.65,17.025
  other v1: 25.375,39
GPIO1_22: JP1_IO.87 JP2_IO.87 U1.R21 | length 44.5
  Top Layer w0.1: JP2_IO.87@2.05,16.225 v1(3.6,16.225) ; U1.R21@25.927,39.449 25.951,39.449 v1(26.4,39)
  MidLayer2 w0.1: v1@3.765,16.225 v1(3.6,16.225) 4,16.625 5.625,16.625 5.975,16.975 5.975,20.707 7.975,22.707 7.975,33.575 8.625,34.225 15.5,34.225 19.65,38.375 25.775,38.375 v1(26.4,39)
  Bottom Layer w0.1: JP1_IO.87@2.25,16.225 v1(3.6,16.225)
GPIO1_23: JP1_IO.88 JP2_IO.88 U1.P22 | length 41.3
  Top Layer w0.1: v1(4.8,16.225) JP2_IO.88@6.85,16.225 ; U1.P22@24.927,38.449 25.401,37.975 v1@25.425,37.975
  MidLayer2 w0.1: v1(4.8,16.225) 5.65,16.225 6.2,16.775 6.2,20.614 8.2,22.614 8.2,30.875 10.75,33.425 15.5,33.425 19.65,37.575 24.975,37.575 v1(25.375,37.975)
  Bottom Layer w0.1: v1(4.8,16.225) JP1_IO.88@6.65,16.225
GPIO1_24: JP1_IO.91 JP2_IO.91 U1.P21 | length 43.5
  Top Layer w0.1: JP2_IO.91@2.05,14.625 v1(3.6,14.625) ; U1.P21@25.927,38.448 v1(26.4,37.975)
  MidLayer2 w0.1: v1(3.6,14.625) 4,15.025 5.675,15.025 6.425,15.775 6.425,20.52 8.425,22.52 8.425,26.825 9.25,27.65 9.9,27.65 10.275,28.025 10.275,31.75 11.15,32.625 15.35,32.625 20.075,37.35 25.775,37.35 v1(26.4,37.975)
  Bottom Layer w0.1: JP1_IO.91@2.25,14.625 v1(3.6,14.625)
GPIO1_25: JP1_IO.92 JP2_IO.92 U1.N22 | length 41.5
  Top Layer w0.1: v1(4.8,14.625) JP2_IO.92@6.85,14.625 ; U1.N22@24.927,37.449 v1@25.425,36.95
  MidLayer2 w0.1: v1(4.8,14.625) 5.65,14.625 6.65,15.625 6.65,20.427 8.65,22.427 8.65,26.732 9.343,27.425 10,27.425 10.5,27.925 10.5,30.925 11.4,31.825 14.868,31.825 17.268,34.225 18.15,34.225 20.475,36.55 24.975,36.55 v1(25.375,36.95)
  Bottom Layer w0.1: v1(4.8,14.625) JP1_IO.92@6.65,14.625
GPIO1_26: JP1_IO.93 JP2_IO.93 U1.N21 | length 44.3
  Top Layer w0.1: JP2_IO.93@2.05,13.825 v1(4.15,13.825) ; U1.N21@25.927,37.449 25.927,37.423 v1(26.4,36.95)
  MidLayer2 w0.1: v1(4.15,13.825) 4.55,14.225 5.65,14.225 6.875,15.45 6.875,20.334 8.875,22.334 8.875,26.639 9.436,27.2 10.1,27.2 10.725,27.825 10.725,30.225 11.525,31.025 15.375,31.025 15.75,31.4 15.75,32.373 17.302,33.925 19.775,33.925 20.075,34.225 20.075,34.925 21.475,36.325 25.775,36.325 v1(26.4,36.95)
  Bottom Layer w0.1: JP1_IO.93@2.25,13.825 v1(4.15,13.825)
GPIO1_27: JP1_IO.94 JP2_IO.94 U1.K22 | length 41.4
  Top Layer w0.1: v1(5.3,13.825) JP2_IO.94@6.85,13.825 ; U1.K22@24.927,34.449 25.026,34.449 v1@25.425,34.05
  MidLayer2 w0.1: v1(5.3,13.825) 5.675,13.825 7.1,15.25 7.1,20.241 9.1,22.241 9.1,25.6 9.7,26.2 10.425,26.2 10.95,26.725 10.95,29.5 11.675,30.225 15.525,30.225 15.975,30.675 15.975,32.279 17.396,33.7 19.875,33.7 20.3,34.125 20.3,34.832 20.968,35.5 24.525,35.5 24.9,35.125 24.9,34.525 v1(25.375,34.05)
  Bottom Layer w0.1: v1(5.3,13.825) JP1_IO.94@6.65,13.825
GPIO1_28: JP1_IO.95 JP2_IO.95 U1.L23 | length 41.5
  Top Layer w0.1: JP2_IO.95@2.05,13.025 v1(3.6,13.025) ; U1.L23@23.927,35.449 24.35,35.026 v1(24.35,34.875)
  MidLayer2 w0.1: v1(3.6,13.025) 4,13.425 5.675,13.425 7.325,15.075 7.325,20.148 9.325,22.148 9.325,25.507 9.768,25.95 10.5,25.95 11.175,26.625 11.175,28.675 11.925,29.425 15.5,29.425 16.2,30.125 16.2,32.186 17.489,33.475 19.975,33.475 20.525,34.025 20.525,34.739 21.061,35.275 23.95,35.275 v1(24.35,34.875)
  Bottom Layer w0.1: JP1_IO.95@2.25,13.025 v1(3.6,13.025)
GPIO1_29: JP1_IO.96 JP2_IO.96 U1.T19 | length 50.6
  Top Layer w0.1: v1(4.8,13.025) JP2_IO.96@6.85,13.025 ; U1.T19@27.927,40.449 28.051,40.449 v1(28.475,40.025)
  DDR layer 1 w0.1: v1(4.8,13.025) 5.4,13.025 5.75,13.375 5.75,17.2 7.777,19.228 7.777,33.077 8.325,33.625 10.375,33.625 10.575,33.425 15.5,33.425 16.1,34.025 16.1,35.1 19.825,38.825 21.675,38.825 22.25,39.4 27.775,39.4 v1(28.475,40.025)
  Bottom Layer w0.1: v1(4.8,13.025) JP1_IO.96@6.65,13.025
GPIO1_30: JP1_IO.97 JP2_IO.97 U1.R19 | length 51
  Top Layer w0.1: JP2_IO.97@2.05,12.225 v1(4.15,12.225) ; U1.R19@27.927,39.449 28.026,39.449 v1(28.475,39)
  DDR layer 1 w0.1: v1(4.15,12.225) 4.55,12.625 5.625,12.625 5.975,12.975 5.975,17.107 8.002,19.134 8.002,32.052 8.575,32.625 15.525,32.625 16.325,33.425 16.325,35 19.925,38.6 28.025,38.6 v1(28.475,39)
  Bottom Layer w0.1: JP1_IO.97@2.25,12.225 v1(4.15,12.225)
GPIO1_31: JP1_IO.98 JP2_IO.98 U1.P20 | length 47.6
  Top Layer w0.1: v1(5.3,12.225) JP2_IO.98@6.85,12.225 ; U1.P20@26.927,38.449 26.976,38.449 v1(27.45,37.975)
  DDR layer 1 w0.1: v1(5.3,12.225) 5.675,12.225 6.2,12.75 6.2,17.014 8.227,19.041 8.227,31.252 8.8,31.825 15.525,31.825 16.55,32.85 16.55,34.9 20.025,38.375 27.025,38.375 v1@27.425,37.975
  Bottom Layer w0.1: v1(5.3,12.225) JP1_IO.98@6.65,12.225
GPIO1_32: JP1_IO.99 JP2_IO.99 U1.P19 | length 49.4
  Top Layer w0.1: JP2_IO.99@2.05,11.425 v1(3.6,11.425) ; U1.P19@27.927,38.449 28.001,38.449 v1(28.475,37.975)
  DDR layer 1 w0.1: v1(3.6,11.425) 4,11.825 5.675,11.825 6.425,12.575 6.425,16.921 8.452,18.948 8.452,27.152 8.95,27.65 9.9,27.65 10.275,28.025 10.275,30.25 11.05,31.025 15.525,31.025 16.775,32.275 16.775,34.35 20,37.575 28.025,37.575 v1(28.475,37.975)
  Bottom Layer w0.1: JP1_IO.99@2.25,11.425 v1(3.6,11.425)
GPIO1_33: JP1_IO.100 JP2_IO.100 U1.N20 | length 47.9
  Top Layer w0.1: v1(4.8,11.425) JP2_IO.100@6.85,11.425 ; U1.N20@26.926,37.449 v1@27.425,36.95
  DDR layer 1 w0.1: v1(4.8,11.425) 5.675,11.425 6.65,12.4 6.65,16.827 8.677,18.855 8.677,27.059 9.043,27.425 10,27.425 10.5,27.925 10.5,29.425 11.3,30.225 15.5,30.225 17,31.725 17,34.25 20.1,37.35 27.025,37.35 v1@27.425,36.95
  Bottom Layer w0.1: v1(4.8,11.425) JP1_IO.100@6.65,11.425
  other v1: 27.45,36.95
GPIO1_34: JP1_IO.101 JP2_IO.101 U1.N19 | length 49.1
  Top Layer w0.1: JP2_IO.101@2.05,10.625 v1(4.15,10.625) ; U1.N19@27.927,37.449 27.976,37.449 v1(28.475,36.95)
  DDR layer 1 w0.1: v1(4.15,10.625) 4.55,11.025 5.675,11.025 6.875,12.225 6.875,16.734 8.902,18.762 8.902,26.966 9.136,27.2 10.1,27.2 10.725,27.825 10.725,28.75 11.4,29.425 15.425,29.425 15.625,29.625 15.625,30.025 17.225,31.625 17.225,33.25 20.525,36.55 28.025,36.55 v1(28.475,36.95)
  Bottom Layer w0.1: JP1_IO.101@2.25,10.625 v1(4.15,10.625)
GPIO1_35: JP1_IO.102 JP2_IO.102 U1.M20 | length 46
  Top Layer w0.1: v1(5.3,10.625) JP2_IO.102@6.85,10.625 ; U1.M20@26.927,36.449 v1(27.45,35.925)
  DDR layer 1 w0.1: v1(5.3,10.625) 5.675,10.625 7.1,12.05 7.1,16.625 9.127,18.652 9.127,25.527 9.775,26.175 10.4,26.175 10.95,26.725 10.95,28.075 11.5,28.625 15.5,28.625 15.85,28.975 15.85,29.925 17.45,31.525 17.45,33.157 18.218,33.925 19.775,33.925 20.075,34.225 20.075,34.95 21.45,36.325 27.025,36.325 v1(27.45,35.925)
  Bottom Layer w0.1: v1(5.3,10.625) JP1_IO.102@6.65,10.625
GPIO1_36: JP1_IO.103 JP2_IO.103 U1.M19 | length 48.7
  Top Layer w0.1: JP2_IO.103@2.05,9.825 v1(3.6,9.825) ; U1.M19@27.927,36.449 28.425,35.95 v1(28.475,35.925)
  DDR layer 1 w0.1: v1(3.6,9.825) 4,10.225 5.675,10.225 7.325,11.875 7.325,16.525 9.352,18.552 9.352,25.434 9.868,25.95 10.5,25.95 11.175,26.625 11.175,27.25 11.75,27.825 15.5,27.825 16.075,28.4 16.075,29.825 17.675,31.425 17.675,33.064 18.311,33.7 19.875,33.7 20.3,34.125 20.3,34.857 20.946,35.503 25.125,35.503 27.925,35.5 28,35.5 v1(28.475,35.925)
  Bottom Layer w0.1: JP1_IO.103@2.25,9.825 v1(3.6,9.825)
GPIO1_37: JP1_IO.104 JP2_IO.104 U1.L20 | length 47.4
  Top Layer w0.1: v1(4.8,9.825) JP2_IO.104@6.85,9.825 ; U1.L20@26.927,35.449 26.927,35.398 v1(27.45,34.875)
  DDR layer 1 w0.1: v1(4.8,9.825) 5.675,9.825 7.55,11.7 7.55,16.425 9.577,18.452 9.577,25.341 9.961,25.725 10.6,25.725 11.9,27.025 15.525,27.025 16.3,27.8 16.3,29.725 17.9,31.325 17.9,32.97 18.405,33.475 19.975,33.475 20.525,34.025 20.525,34.764 21.036,35.275 27.025,35.275 v1(27.45,34.875)
  Bottom Layer w0.1: v1(4.8,9.825) JP1_IO.104@6.65,9.825
GPIO1_38: JP1_IO.105 JP2_IO.105 U1.L19 | length 48.5
  Top Layer w0.1: JP2_IO.105@2.05,9.025 v1(4.15,9.025) ; U1.L19@27.927,35.448 v1(28.475,34.9)
  DDR layer 1 w0.1: v1(4.15,9.025) 4.55,9.425 5.6,9.425 7.775,11.6 7.775,16.325 10.65,19.2 10.65,25.457 11.418,26.225 15.525,26.225 16.525,27.225 16.525,29.625 18.125,31.225 18.125,32.125 18.6,32.6 19.925,32.6 20.1,32.775 20.1,33.275 21.275,34.45 28,34.45 v1(28.475,34.9)
  Bottom Layer w0.1: JP1_IO.105@2.25,9.025 v1(4.15,9.025)
GPIO1_39: JP1_IO.106 JP2_IO.106 U1.L25 | length 41.6
  Top Layer w0.1: v1(5.3,9.025) JP2_IO.106@6.85,9.025 ; U1.L25@21.927,35.449 21.927,35.348 v1(22.4,34.875)
  MidLayer2 w0.1: v1(5.3,9.025) 5.75,9.475 5.75,13.175 7.55,14.975 7.55,20.05 9.55,22.05 9.55,25.414 9.861,25.725 10.6,25.725 11.4,26.525 11.4,28 12.025,28.625 15.525,28.625 16.425,29.525 16.425,32.025 17,32.6 19.9,32.6 20.075,32.775 20.075,33.25 20.75,33.925 20.75,34.625 21,34.875 v1(22.4,34.875)
  Bottom Layer w0.1: v1(5.3,9.025) JP1_IO.106@6.65,9.025
GPIO1_40: JP1_IO.107 JP2_IO.107 U1.K23 | length 45.3
  Top Layer w0.1: JP2_IO.107@2.1,8.275 JP2_IO.107@2.05,8.225 v1(3.6,8.225) ; U1.K23@23.927,34.449 24.001,34.449 v1@24.4,34.05
  MidLayer2 w0.1: v1(3.6,8.225) 4,8.625 5.675,8.625 5.975,8.925 5.975,13.082 7.775,14.882 7.775,19.95 9.775,21.95 9.775,25.32 9.955,25.5 10.7,25.5 11.625,26.425 11.625,27.225 12.225,27.825 15.525,27.825 16.65,28.95 16.65,31.932 17.093,32.375 20.025,32.375 20.3,32.65 20.3,33.15 21.6,34.45 23.95,34.45 v1(24.35,34.05)
  Bottom Layer w0.1: JP1_IO.107@2.25,8.225 v1(3.6,8.225)
GPIO1_41: JP1_IO.108 JP2_IO.108 U1.K25 | length 42.4
  Top Layer w0.1: v1(4.8,8.225) JP2_IO.108@6.85,8.225 ; U1.K25@21.927,34.449 22.326,34.05 v1(22.4,34.05)
  MidLayer2 w0.1: v1(4.8,8.225) 5.675,8.225 6.2,8.75 6.2,12.989 8,14.789 8,19.857 9.193,21.05 10.125,21.05 10.65,21.575 10.65,25.125 12.55,27.025 15.525,27.025 16.875,28.375 16.875,30.95 17.475,31.55 19.875,31.55 20.075,31.75 20.075,32.1 20.525,32.55 20.525,33.05 21.525,34.05 v1(22.4,34.05)
  Bottom Layer w0.1: v1(4.8,8.225) JP1_IO.108@6.65,8.225
GPIO1_42: JP1_IO.109 JP2_IO.109 U1.K24 | length 44.8
  Top Layer w0.1: JP2_IO.109@2.05,7.425 v1(4.15,7.425) ; U1.K24@22.927,34.449 23.026,34.449 v1@23.425,34.05
  MidLayer2 w0.1: v1(4.15,7.425) 4.55,7.825 5.7,7.825 6.425,8.55 6.425,12.895 8.225,14.695 8.225,19.764 9.286,20.825 10.225,20.825 10.875,21.475 10.875,25.032 12.068,26.225 15.5,26.225 17.1,27.825 17.1,30.857 17.568,31.325 19.975,31.325 20.3,31.65 20.3,32 20.75,32.45 20.75,32.957 21.418,33.625 22.975,33.625 v1@23.4,34.05
  Bottom Layer w0.1: JP1_IO.109@2.25,7.425 v1(4.15,7.425)
  other v1: 23.45,34.05
GPIO1_43: JP1_IO.110 JP2_IO.110 U1.J25 | length 41.2
  Top Layer w0.1: v1(5.3,7.425) JP2_IO.110@6.85,7.425 ; U1.J25@21.927,33.499 v1@22.425,33.001
  MidLayer2 w0.1: v1(5.3,7.425) 5.675,7.425 6.65,8.4 6.65,12.802 8.45,14.602 8.45,19.67 9.38,20.6 10.325,20.6 11.1,21.375 11.1,24.939 11.586,25.425 15.525,25.425 17.325,27.225 17.325,30.764 17.661,31.1 20.125,31.1 20.525,31.5 20.525,31.9 21.2,32.575 21.975,32.575 v1(22.4,33)
  Bottom Layer w0.1: v1(5.3,7.425) JP1_IO.110@6.65,7.425
GPIO1_44: JP1_IO.111 JP2_IO.111 U1.J23 | length 44.6
  Top Layer w0.1: JP2_IO.111@2.05,6.625 v1(3.6,6.625) ; U1.J23@23.927,33.449 24.376,33 v1@24.4,33
  MidLayer2 w0.1: v1(3.6,6.625) 4,7.025 5.675,7.025 6.875,8.225 6.875,12.709 8.675,14.509 8.675,19.577 9.473,20.375 10.425,20.375 11.325,21.275 11.325,24.15 11.8,24.625 15.5,24.625 17.55,26.675 17.55,29.775 18.05,30.275 19.9,30.275 21.025,31.4 21.55,31.4 21.85,31.7 21.85,32.075 22.366,32.591 23.991,32.591 v1@24.4,33
  Bottom Layer w0.1: JP1_IO.111@2.25,6.625 v1(3.6,6.625)
  other v1: 24.35,33
GPIO1_45: JP1_IO.112 JP2_IO.112 U1.J22 | length 45.6
  Top Layer w0.1: v1(4.775,6.625) JP2_IO.112@6.85,6.625 ; U1.J22@24.927,33.449 24.976,33.449 v1@25.425,33
  MidLayer2 w0.1: v1(4.775,6.625) 5.675,6.625 7.1,8.05 7.1,12.616 8.9,14.416 8.9,19.484 9.566,20.15 10.525,20.15 11.55,21.175 11.55,23.275 12.1,23.825 15.525,23.825 17.775,26.075 17.775,28.925 18.25,29.4 19.9,29.4 20.1,29.6 20.1,30.125 20.525,30.55 21.6,30.55 21.85,30.8 21.85,31.15 22.1,31.4 22.725,31.4 22.925,31.6 22.925,32.1 23.175,32.35 24.775,32.35 v1@25.425,33
  Bottom Layer w0.1: v1(4.775,6.625) JP1_IO.112@6.65,6.625
  other v1: 25.375,33
GPIO1_46: JP1_IO.113 JP2_IO.113 U1.H22 | length 45.4
  Top Layer w0.1: JP2_IO.113@2.05,5.825 v1(4.15,5.825) ; U1.H22@24.927,32.449 v1@25.425,31.951
  MidLayer2 w0.1: v1(4.15,5.825) 4.55,6.225 5.675,6.225 7.325,7.875 7.325,12.5 9.775,14.95 9.775,19.725 9.975,19.925 10.625,19.925 11.775,21.075 11.775,22.375 12.425,23.025 15.5,23.025 18,25.525 18,28.075 18.425,28.5 19.85,28.5 20.325,28.975 20.325,30.032 20.618,30.325 22.525,30.325 22.925,30.725 22.925,31.15 23.175,31.4 24.825,31.4 v1(25.375,31.95)
  Bottom Layer w0.1: JP1_IO.113@2.25,5.825 v1(4.15,5.825)
GPIO1_47: JP1_IO.114 JP2_IO.114 U1.G23 | length 40.4
  Top Layer w0.1: v1(5.3,5.825) JP2_IO.114@6.85,5.825 ; U1.G23@23.927,31.449 v1@24.413,30.963
  MidLayer2 w0.1: v1(5.3,5.825) 5.675,5.825 7.55,7.7 7.55,11.425 9.775,13.65 9.775,14.625 10.625,15.475 10.625,19.6 13.25,22.225 15.5,22.225 18.225,24.95 18.225,27.975 18.525,28.275 19.95,28.275 21.125,29.45 22.7,29.45 22.925,29.675 22.925,30.3 23.175,30.55 23.95,30.55 v1(24.35,30.95)
  Bottom Layer w0.1: v1(5.3,5.825) JP1_IO.114@6.65,5.825
GPIO1_48: JP1_IO.115 JP2_IO.115 U1.B10 | length 60.4
  Top Layer w0.1: JP2_IO.115@2.05,5.025 v1(3.6,5.025) ; U1.B10@36.927,26.449 36.927,26.424 v1(37.375,25.976)
  DDR layer 1 w0.1: v1(3.6,5.025) 4.025,5.025 4.775,4.275 4.775,3.225 5.125,2.875 12.575,2.875 13.225,2.225 21.807,2.225 22.157,2.575 33.257,2.575 34.95,4.268 34.95,8.043 36.9,9.993 36.9,25.501 v1(37.375,25.976)
  Bottom Layer w0.1: JP1_IO.115@2.25,5.025 3.7,5.025 v1(3.6,5.025)
GPIO1_49: JP1_IO.116 JP2_IO.116 U1.B11 | length 58.6
  Top Layer w0.1: v1(4.775,5.025) JP2_IO.116@6.85,5.025 ; U1.B11@35.927,26.449 36.001,26.449 v1(36.475,25.975)
  DDR layer 1 w0.1: v1(4.775,5.025) 5.15,5.025 6.575,3.6 12.775,3.6 13.525,2.85 21.764,2.85 21.961,3.047 33.061,3.047 34.478,4.464 34.478,8.239 36.428,10.189 36.428,23.175 36.075,23.528 36.075,25.575 v1(36.475,25.975)
  Bottom Layer w0.1: v1(4.775,5.025) 5.2,5.025 JP1_IO.116@6.65,5.025
GPIO1_50: JP1_IO.117 JP2_IO.117 U1.A10 | length 59.7
  Top Layer w0.1: JP2_IO.117@2.05,4.225 v1(4.15,4.225) ; U1.A10@36.927,25.449 36.927,25.373 v1(37.375,24.925)
  DDR layer 1 w0.1: v1(4.15,4.225) 4.475,3.9 4.475,3.1 4.95,2.625 12.3,2.625 12.95,1.975 21.875,1.975 22.25,2.35 33.35,2.35 35.175,4.175 35.175,7.95 37.125,9.9 37.125,24.675 v1(37.375,24.925)
  Bottom Layer w0.1: JP1_IO.117@2.25,4.225 3.7,4.225 v1(4.15,4.225)
GPIO1_51: JP1_IO.118 JP2_IO.118 U1.A11 | length 56
  Top Layer w0.1: v1(5.3,4.225) JP2_IO.118@6.85,4.225 ; U1.A11@35.977,25.449 U1.A11@35.927,25.449 36.451,24.925 v1(36.475,24.925)
  DDR layer 1 w0.1: v1(5.3,4.225) 6.25,3.275 12.675,3.275 13.4,2.55 21.782,2.55 22.054,2.822 33.154,2.822 34.703,4.371 34.703,8.146 36.653,10.096 36.653,23.272 36.475,23.45 v1(36.475,24.925)
  Bottom Layer w0.1: v1@5.275,4.225 JP1_IO.118@6.65,4.225
GPIO2_0: JP1_IO2.3 JP2_IO2.3 U1.AE24 | length 14.5
  Top Layer w0.1: JP1_IO2.3@11.918,49.826 JP1_IO2.3@11.918,49.826 v1(13.575,49.825) ; U1.AE24@22.927,49.449 22.927,49.423 v1(23.45,48.9)
  DDR layer 2 w0.1: v1(13.575,49.825) 13.975,50.225 15.525,50.225 15.95,49.8 20.625,49.8 21,49.425 22.925,49.425 v1(23.45,48.9)
  Bottom Layer w0.1: JP2_IO2.3@12.118,49.826 12.119,49.825 v1(13.575,49.825)
GPIO2_1: JP1_IO2.4 JP2_IO2.4 U1.AF23 | length 14.7
  Top Layer w0.1: v1(14.65,49.825) JP1_IO2.4@16.718,49.826 JP1_IO2.4@16.718,49.826 ; U1.AF23@23.927,50.449 23.927,50.373 v1(24.35,49.95)
  MidLayer2 w0.1: v1(14.65,49.825) 20.3,49.825 20.825,50.35 23.95,50.35 v1(24.35,49.95)
  Bottom Layer w0.1: v1(14.65,49.825) 16.517,49.825 JP2_IO2.4@16.518,49.826
GPIO2_2: JP1_IO2.5 JP2_IO2.5 U1.AF20 | length 20.2
  Top Layer w0.1: JP1_IO2.5@11.918,49.026 v1(14.025,49.025) ; U1.AF20@26.927,50.449 26.951,50.449 v1(27.45,49.95)
  DDR layer 1 w0.1: v1(14.025,49.025) 14.025,49.85 14.4,50.225 18.825,50.225 19.403,50.803 20.727,50.803 20.95,51.025 22.875,51.025 23.1,50.8 27.125,50.8 27.45,50.475 v1(27.45,49.95)
  Bottom Layer w0.1: JP2_IO2.5@12.118,49.026 v1(14.025,49.025)